# Altium PCB Standard 60.PcbDoc
Units mil, origin at the board's own origin, x right, y up, seen from the top; angles counter-clockwise.
Board outline 11157.21 x 3737.43 mil, 2 copper layers (Top Layer, Bottom Layer); 138 components, 95 nets, 535 pads, 0 vias.
Unrouted connection lines stored in the file: 182.
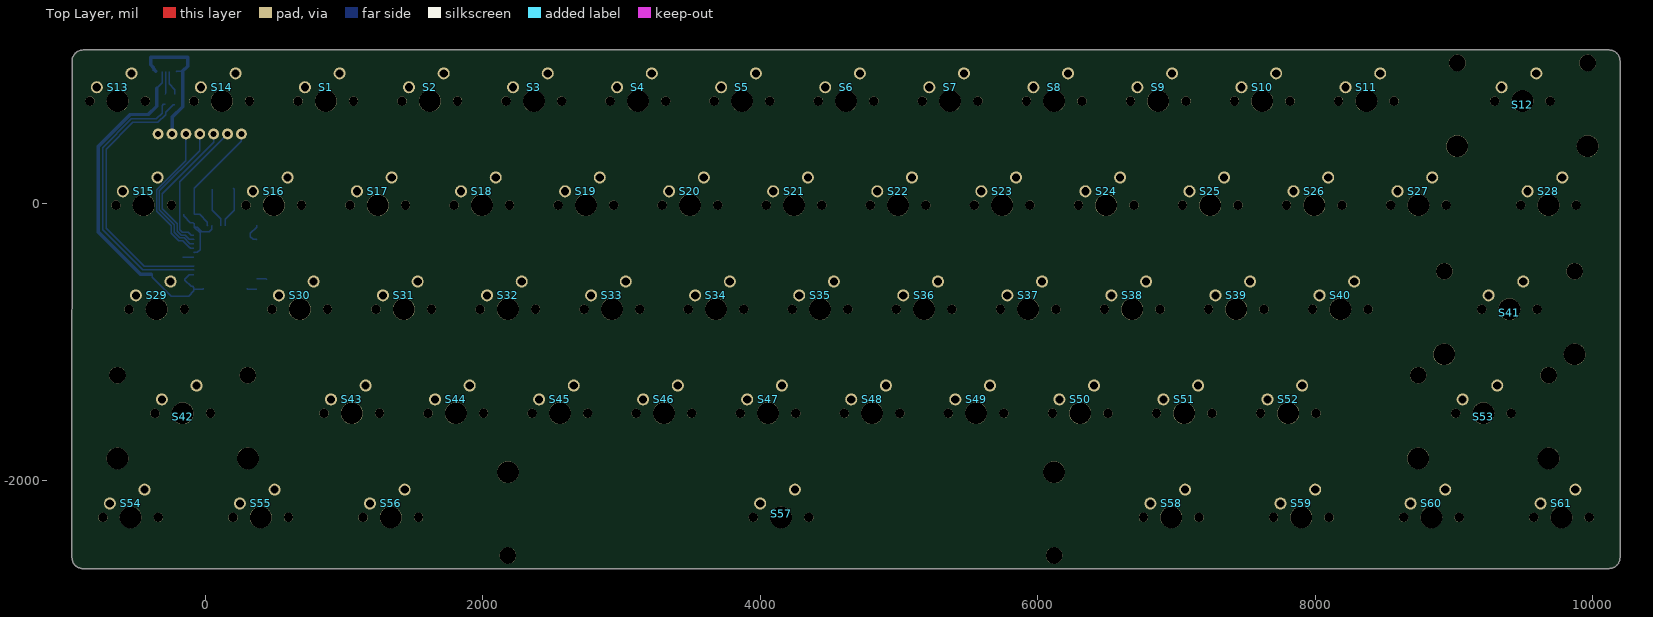
[diagram p0: Top Layer view]
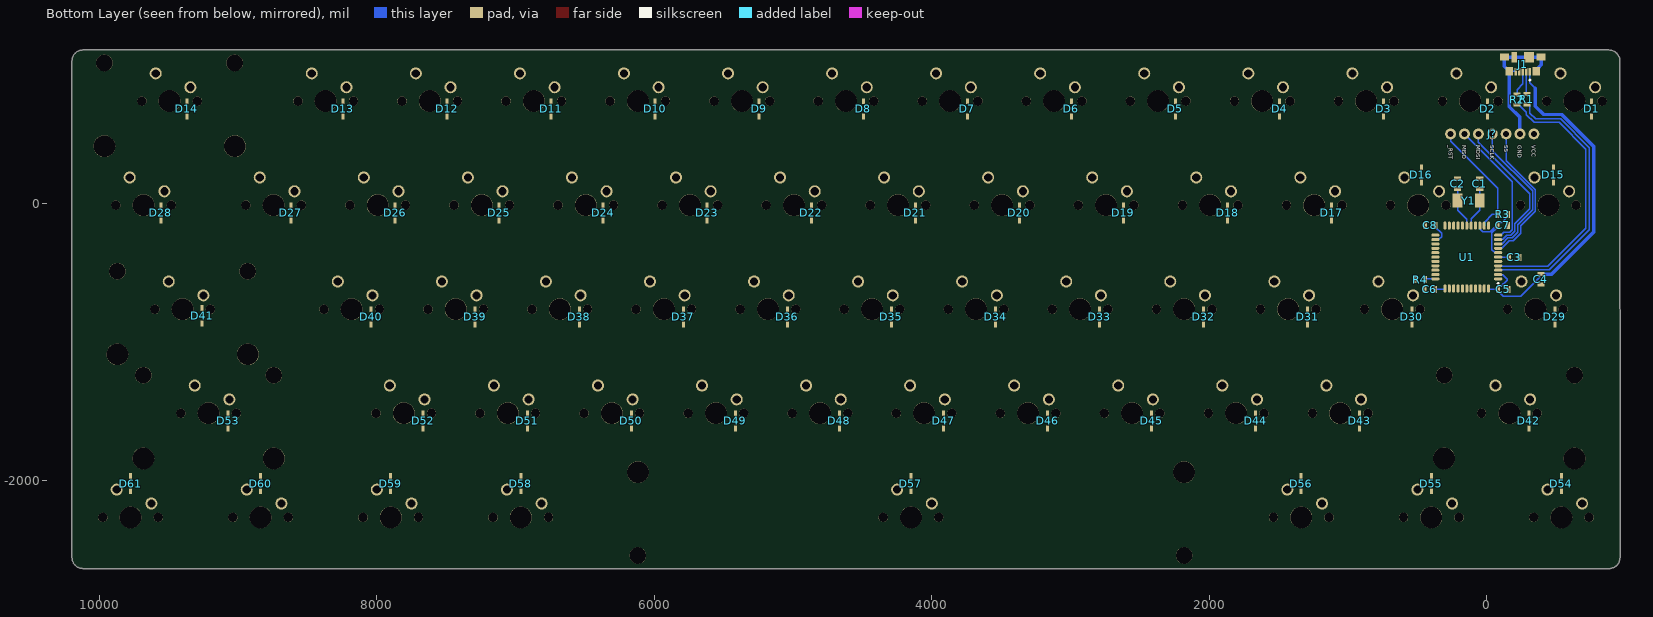
[diagram p1: Bottom Layer view, seen from below]

## Layer stack, top to bottom
Top Solder: solder mask 0.4, Solder Resist, Dk 3.5
Top Layer: signal copper 1.4
Dielectric 1: dielectric 12.6, FR-4, Dk 4.8
Bottom Layer: signal copper 1.4
Bottom Solder: solder mask 0.4, Solder Resist, Dk 3.5

## Board outline
-882.16,-2632.57 cw(c-882.16,-2553.83) -960.9,-2553.82 -960.15,1026.14 cw(c-881.41,1026.12) -881.41,1104.86 10117.57,1104.86 cw(c10117.57,1026.12) 10196.31,1026.12 10196.31,-2553.65 cw(c10117.57,-2553.65) 10117.57,-2632.39

## Design rules (kind name [scope] priority, off if disabled: settings)
Clearance [All] p1: gap=10 ignorepadtopadclearanceinfootprint=TRUE
ComponentClearance [All] p1: gap=10 collisioncheckmode=3 verticalgap=10 showdistances=FALSE donotcheckwithout3dbody=TRUE checkcomponentboundary=TRUE
DiffPairsRouting [All] p1: maxlimit=100 minlimit=10 mostfreqgap=15 toplayer_minwidth=10 toplayer_maxwidth=100 toplayer_prefwidth=15 bottomlayer_minwidth=10 bottomlayer_maxwidth=100 bottomlayer_prefwidth=15 maxuncoupledlength=500
PolygonConnect [All] p1: connectstyle=Relief reliefconductorwidth=10 reliefentries=4 polygonreliefangle="90 Angle" airgapwidth=10
RoutingVias [All] p1: holewidth=27.56 width=47.24 viastyle="Through Hole" minholewidth=19.68 minwidth=39.37 maxholewidth=39.37 maxwidth=59.06
SolderMaskExpansion [All] p1: expansion=4 istentingtop=FALSE
Width [All] p1: maxlimit=1000 minlimit=10 preferedwidth=25
28 further rules are at their usual default settings.

## Classes and differential pairs
net class ROW[5..1]: ROW1 ROW2 ROW3 ROW4 ROW5
net class COL[14..1]: COL1 COL2 COL3 COL4 COL5 COL6 COL7 COL8 COL9 COL10 COL11 COL12 COL13 COL14
component class MCU: C1 C2 C3 C4 C5 C6 C7 C8 J? R1 R2 R3 R4 U1 Y1
component class matrix: D1 D2 D3 D4 D5 D6 D7 D8 D9 D10 D11 D12 D13 D14 D15 D16 D17 D18 D19 D20 D21 D22 D23 D24 D25 D26 D27 D28 D29 D30 D31 D32 D33 D34 D35 D36 D37 D38 D39 D40 D41 D42 D43 D44 D45 D46 D47 D48 D49 D50 D51 D52 D53 D54 D55 D56 D57 D58 D59 D60 D61 S1 S2 S3 S4 S5 S6 S7 S8 S9 S10 S11 S12 S13 S14 S15 S16 S17 S18 S19 S20 S21 S22 S23 S24 S25 S26 S27 S28 S29 S30 S31 S32 S33 S34 S35 S36 S37 S38 S39 S40 S41 S42 S43 S44 S45 S46 S47 S48 S49 S50 S51 S52 S53 S54 S55 S56 S57 S58 S59 S60 S61
differential pair XT: +XT_P -XT_N
differential pair DP: +DP_P -DP_N
differential pair DP1: +DP1_P -DP1_N

## Components (designator, comment, footprint, x,y, rotation, side; value= is the part's Value field where it differs from the comment)
C1 "Cap" 0805 50,140 r270 bottom value=22pf
C2 "Cap" 0805 210,140 r270 bottom value=22pf
C3 "Cap" 0805 -200,-390 r0 bottom value=1uf
C4 "Cap" 0805 -390,-547.5 r90 bottom value=10uf
C5 "Cap" 0805 -120,-620 r0 bottom value=0.1uf
C6 "Cap" 0805 410,-620 r180 bottom value=0.1uf
C7 "Cap" 0805 -117.5,-160 r0 bottom value=0.1uf
C8 "Cap" 0805 407.5,-160 r180 bottom value=0.1uf
D1 "Diode" SOD-323F -756.94,681.18 r90 bottom
D2 "Diode" SOD-323F -6.94,681.18 r90 bottom
D3 "Diode" SOD-323F 743.06,681.18 r90 bottom
D4 "Diode" SOD-323F 1493.06,681.18 r90 bottom
D5 "Diode" SOD-323F 2243.06,681.18 r90 bottom
D6 "Diode" SOD-323F 2993.06,681.18 r90 bottom
D7 "Diode" SOD-323F 3743.06,681.18 r90 bottom
D8 "Diode" SOD-323F 4493.06,681.18 r90 bottom
D9 "Diode" SOD-323F 5243.06,681.18 r90 bottom
D10 "Diode" SOD-323F 5993.06,681.18 r90 bottom
D11 "Diode" SOD-323F 6743.06,681.18 r90 bottom
D12 "Diode" SOD-323F 7493.06,681.18 r90 bottom
D13 "Diode" SOD-323F 8243.06,681.18 r90 bottom
D14 "Diode" SOD-323F 9368.06,681.18 r90 bottom
D15 "Diode" SOD-323F -480,205.12 r270 bottom
D16 "Diode" SOD-323F 470,204.88 r270 bottom
D17 "Diode" SOD-323F 1118.03,-68.82 r90 bottom
D18 "Diode" SOD-323F 1868.03,-68.82 r90 bottom
D19 "Diode" SOD-323F 2618.03,-68.82 r90 bottom
D20 "Diode" SOD-323F 3368.03,-68.82 r90 bottom
D21 "Diode" SOD-323F 4118.03,-68.82 r90 bottom
D22 "Diode" SOD-323F 4868.03,-68.82 r90 bottom
D23 "Diode" SOD-323F 5618.03,-68.82 r90 bottom
D24 "Diode" SOD-323F 6368.03,-68.82 r90 bottom
D25 "Diode" SOD-323F 7118.03,-68.82 r90 bottom
D26 "Diode" SOD-323F 7868.03,-68.82 r90 bottom
D27 "Diode" SOD-323F 8618.03,-68.82 r90 bottom
D28 "Diode" SOD-323F 9555.52,-68.82 r90 bottom
D29 "Diode" SOD-323F -491.35,-818.82 r90 bottom
D30 "Diode" SOD-323F 539.9,-818.82 r90 bottom
D31 "Diode" SOD-323F 1289.9,-818.82 r90 bottom
D32 "Diode" SOD-323F 2039.9,-818.82 r90 bottom
D33 "Diode" SOD-323F 2789.9,-818.82 r90 bottom
D34 "Diode" SOD-323F 3539.9,-818.82 r90 bottom
D35 "Diode" SOD-323F 4289.9,-818.82 r90 bottom
D36 "Diode" SOD-323F 5039.9,-818.82 r90 bottom
D37 "Diode" SOD-323F 5789.9,-818.82 r90 bottom
D38 "Diode" SOD-323F 6539.9,-818.82 r90 bottom
D39 "Diode" SOD-323F 7289.9,-818.82 r90 bottom
D40 "Diode" SOD-323F 8039.9,-818.82 r90 bottom
D41 "Diode" SOD-323F 9258.65,-810.58 r90 bottom
D42 "Diode" SOD-323F -303.85,-1568.82 r90 bottom
D43 "Diode" SOD-323F 914.9,-1568.82 r90 bottom
D44 "Diode" SOD-323F 1664.9,-1568.82 r90 bottom
D45 "Diode" SOD-323F 2414.9,-1568.82 r90 bottom
D46 "Diode" SOD-323F 3164.9,-1568.82 r90 bottom
D47 "Diode" SOD-323F 3914.9,-1568.82 r90 bottom
D48 "Diode" SOD-323F 4664.9,-1568.82 r90 bottom
D49 "Diode" SOD-323F 5414.9,-1568.82 r90 bottom
D50 "Diode" SOD-323F 6164.9,-1568.82 r90 bottom
D51 "Diode" SOD-323F 6914.9,-1568.82 r90 bottom
D52 "Diode" SOD-323F 7664.9,-1568.82 r90 bottom
D53 "Diode" SOD-323F 9071.15,-1568.82 r90 bottom
D54 "Diode" SOD-323F -538.23,-2021.09 r270 bottom
D55 "Diode" SOD-323F 399.27,-2021.09 r270 bottom
D56 "Diode" SOD-323F 1336.77,-2021.09 r270 bottom
D57 "Diode" SOD-323F 4149.27,-2021.09 r270 bottom
D58 "Diode" SOD-323F 6961.77,-2021.09 r270 bottom
D59 "Diode" SOD-323F 7899.27,-2021.09 r270 bottom
D60 "Diode" SOD-323F 8836.77,-2021.09 r270 bottom
D61 "Diode" SOD-323F 9774.27,-2021.09 r270 bottom
J1 "Molex 473460001" "MOLEX 47346 0001" -260,1040 r0 bottom
J? "ISP HEADER" "SPI HEADER" -340,500 r270 bottom
R1 "Res" 0805 -290,750 r270 bottom value=22
R2 "Res" 0805 -220,747.5 r270 bottom value=22
R3 "Res" 0805 -117.5,-80 r0 bottom value=10k
R4 "Res" 0805 480,-550 r0 bottom value=10k
S1 "1u" MX1U 868.06,736.3 r0 top
S2 "1u" MX1U 1618.03,736.3 r0 top
S3 "1u" MX1U 2368.06,736.3 r0 top
S4 "1u" MX1U 3118.06,736.3 r0 top
S5 "1u" MX1U 3868.06,736.3 r0 top
S6 "1u" MX1U 4618.06,736.3 r0 top
S7 "1u" MX1U 5368.02,736.3 r0 top
S8 "1u" MX1U 6118.06,736.3 r0 top
S9 "1u" MX1U 6868.02,736.3 r0 top
S10 "1u" MX1U 7618.06,736.3 r0 top
S11 "1u" MX1U 8368.06,736.3 r0 top
S12 "2u" MX2U 9493.02,736.3 r0 top
S13 "1u" MX1U -631.94,736.3 r0 top
S14 "1u" MX1U 118.06,736.3 r0 top
S15 "1u" MX1U -444.42,-13.7 r0 top
S16 "1u" MX1U 493.03,-13.7 r0 top
S17 "1u" MX1U 1243.06,-13.7 r0 top
S18 "1u" MX1U 1993.06,-13.7 r0 top
S19 "1u" MX1U 2743.06,-13.7 r0 top
S20 "1u" MX1U 3493.02,-13.7 r0 top
S21 "1u" MX1U 4243.03,-13.7 r0 top
S22 "1u" MX1U 4993.02,-13.7 r0 top
S23 "1u" MX1U 5743.06,-13.7 r0 top
S24 "1u" MX1U 6493.06,-13.7 r0 top
S25 "1u" MX1U 7243.02,-13.7 r0 top
S26 "1u" MX1U 7993.06,-13.7 r0 top
S27 "1u" MX1U 8743.02,-13.7 r0 top
S28 "1u" MX1U 9680.52,-13.7 r0 top
S29 "1u" MX1U -350.67,-763.73 r0 top
S30 "1u" MX1U 680.59,-763.73 r0 top
S31 "1u" MX1U 1430.5,-763.73 r0 top
S32 "1u" MX1U 2180.53,-763.73 r0 top
S33 "1u" MX1U 2930.53,-763.73 r0 top
S34 "1u" MX1U 3680.52,-763.73 r0 top
S35 "1u" MX1U 4430.52,-763.73 r0 top
S36 "1u" MX1U 5180.52,-763.73 r0 top
S37 "1u" MX1U 5930.58,-763.73 r0 top
S38 "1u" MX1U 6680.52,-763.73 r0 top
S39 "1u" MX1U 7430.58,-763.73 r0 top
S40 "1u" MX1U 8180.58,-763.73 r0 top
S41 "2u" MX2U 9399.25,-763.73 r0 top
S42 "2u" MX2U -163.22,-1513.71 r0 top
S43 "1u" MX1U 1055.59,-1513.71 r0 top
S44 "1u" MX1U 1805.59,-1513.71 r0 top
S45 "1u" MX1U 2555.59,-1513.71 r0 top
S46 "1u" MX1U 3305.52,-1513.71 r0 top
S47 "1u" MX1U 4055.58,-1513.71 r0 top
S48 "1u" MX1U 4805.52,-1513.71 r0 top
S49 "1u" MX1U 5555.58,-1513.71 r0 top
S50 "1u" MX1U 6305.58,-1513.71 r0 top
S51 "1u" MX1U 7055.52,-1513.71 r0 top
S52 "1u" MX1U 7805.58,-1513.71 r0 top
S53 "2u" MX2U 9211.78,-1513.71 r0 top
S54 "1u" MX1U -538.19,-2263.7 r0 top
S55 "1u" MX1U 399.28,-2263.7 r0 top
S56 "1u" MX1U 1336.81,-2263.7 r0 top
S57 "6.25u" "MX6.25U FLIPPED STAB" 4149.32,-2263.7 r0 top
S58 "1u" MX1U 6961.78,-2263.7 r0 top
S59 "1u" MX1U 7899.32,-2263.7 r0 top
S60 "1u" MX1U 8836.78,-2263.7 r0 top
S61 "1u" MX1U 9774.28,-2263.7 r0 top
U1 "ATmega32U4" TQFP44 143.62,-387.48 r0 bottom
Y1 "XTAL" ABM3 130,20 r0 bottom value=16MHz

## Footprints (in the part's own frame and the unit in brackets; to place one, negate y for a bottom-side part, rotate by r counter-clockwise, add the part's x,y. Pads: shape width x height; smd on the part's side, far side on the other; paste and mask are expansions set on the pad)
0805 [mil]
  rect 28x51 smd: 1(-37.5,0) 2(37.5,0)
ABM3 [mil] "ABRACON SMD XTAL PACKAGE"
  rect 70x100 smd: 1(-80,0) 2(80,0)
"MOLEX 47346 0001" [mm]
  rect 0.45x1.38 smd paste+0 mask+0: 1(-1.3,2.31) 2(-0.65,2.31) 3(0,2.31) 4(0.65,2.31) 5(1.3,2.31)
  rect 1.425x1.55 smd paste+0 mask+0: 6(-2.488,2.225) 7(2.488,2.225)
  rect 1.65x1.3 smd paste+0 mask+0: 8(-3.375,-0.35) 11(3.375,-0.35)
  rect 1.8x1.9 smd paste+0 mask+0: 9(-1.15,-0.35)
  rect 1x1.9 smd paste+0 mask+0: 10(1.55,-0.35)
  silkscreen extent -1.45,3.73 -1.2,3.97
MX1U [mm]
  round 2.2 hole 1.5: 1(2.54,5.08) 2(-3.81,2.54)
  round 1.7 hole 1.7 unplated: ""(-5.08,0) ""(5.08,0)
  round 4 hole 4 unplated: ""(0,0)
MX2U [mil]
  round 86.61 hole 59.06: 1(100,200) 2(-150,100)
  round 157 hole 157 unplated: ""(-470,-325) ""(470,-325)
  round 120 hole 120 unplated: ""(-470,275) ""(470,275)
  round 66.93 hole 66.93 unplated: ""(-200,0) ""(200,0)
  round 157.48 hole 157.48 unplated: ""(0,0)
"MX6.25U FLIPPED STAB" [mm]
  round 2.2 hole 1.5: 1(2.54,5.08) 2(-3.81,2.54)
  round 3.048 hole 3.048 unplated: ""(-50,-6.985) ""(50,-6.985)
  round 3.988 hole 3.988 unplated: ""(-50,8.255) ""(50,8.255)
  round 1.7 hole 1.7 unplated: ""(-5.08,0) ""(5.08,0)
  round 4 hole 4 unplated: ""(0,0)
SOD-323F [mm]
  rect 1.05x0.55 smd: 1(-1.4,0) 2(1.4,0)
"SPI HEADER" [mm]
  round 2 hole 1.1: 1(0,0) 2(0,-2.54) 3(0,-5.08) 4(0,-7.62) 5(0,-10.16) 6(0,-12.7) 7(0,-15.24)
TQFP44 [mm] "TQFP, 44-Leads, Body 10.00x10.00mm"
  oval 1.5x0.55 smd: 1(-5.75,4) 2(-5.75,3.2) 3(-5.75,2.4) 4(-5.75,1.6) 5(-5.75,0.8) 6(-5.75,0) 7(-5.75,-0.8) 8(-5.75,-1.6) 9(-5.75,-2.4) 10(-5.75,-3.2) 11(-5.75,-4) 23(5.75,-4) 24(5.75,-3.2) 25(5.75,-2.4) 26(5.75,-1.6) 27(5.75,-0.8) 28(5.75,0) 29(5.75,0.8) 30(5.75,1.6) 31(5.75,2.4) 32(5.75,3.2) 33(5.75,4)
  oval 0.55x1.5 smd: 12(-4,-5.75) 13(-3.2,-5.75) 14(-2.4,-5.75) 15(-1.6,-5.75) 16(-0.8,-5.75) 17(0,-5.75) 18(0.8,-5.75) 19(1.6,-5.75) 20(2.4,-5.75) 21(3.2,-5.75) 22(4,-5.75) 34(4,5.75) 35(3.2,5.75) 36(2.4,5.75) 37(1.6,5.75) 38(0.8,5.75) 39(0,5.75) 40(-0.8,5.75) 41(-1.6,5.75) 42(-2.4,5.75) 43(-3.2,5.75) 44(-4,5.75)
  silkscreen extent -5.87,4.7 -5.63,4.95

## Part data
C1 C2 C3 C4 C5 C6 C7 C8: "Capacitor"
J1: "Micro usb receptacle"
R1 R2 R3 R4: "Resistor"
  R1: LatestRevisionDate=17-Jul-2002, LatestRevisionNote="Re-released for DXP Platform.", PackageDescription="Axial Device, Thru-Hole; 2 Leads; 0.4 in Pin Spacing", PackageReference=AXIAL-0.4, Published=8-Jun-2000, Publisher="Altium Limited"
S1 S2 S3 S4 S5 S6 S7 S8 S9 S10 S11 S13 S14 S15 S16 S17 S18 S19 S20 S21 S22 S23 S24 S25 S26 S27 S28 S29 S30 S31 S32 S33 S34 S35 S36 S37 S38 S39 S40 S43 S44 S45 S46 S47 S48 S49 S50 S51 S52 S54 S55 S56 S58 S59 S60 S61: "1-2u Mx Switch"
S12 S41 S42 S53: "2-3u Mx Switch with pcb mount stabs"
S57: "6.25u Mx Switch with pcb mount stabs"
U1: "8-bit AVR Microcontroller", Manufacturer="Microchip / Atmel", Manufacturer Part Number=ATMEGA32U4-AU, ComponentLink1Description="Manufacturer URL", ComponentLink1URL=http://www.atmel.com/, ComponentLink2Description="ATmega16U4/32U4 Datasheet", ComponentLink2URL=http://www.atmel.com/dyn/resources/prod_documents/doc7766.pdf, ComponentLink3Description="ATmega16U4 ATmega32U4 Summary", ComponentLink3URL=http://www.atmel.com/dyn/resources/prod_documents/7766S.pdf, DatasheetVersion="revF, Nov-2010", PackageDescription="44-Pin Plastic Thin Quad Flat Pack, 10 x 10 x 1.0 mm Body, 0.8 mm Pitch (TQFP)", PackageReference=44ML, PackageVersion="rev.G, Jul-2007", RevisionNote="DatasheetVersion updated. URLs added."
Y1: "Crystal Oscillator"

## Nets (pads, with @x,y where several pads share a name; then routed paths per layer and width w, separated by ;. In a path a pad name is that pad's centre, name@x,y a point inside that pad or via, vN(x,y) a via of type N, cw(c..) or ccw(c..) an arc to the next point about the centre after c; other vN are vias at no path point)
\R\E\S\E\T\: J?.7 R3.2 U1.13 | length 866
  Bottom Layer w10: U1.13 15.41,-158.87 15.41,-135.14 -39.74,-80 R3.2 -80,108.21 257.42,445.63 257.42,497.42 J?.7
COL1: S13.1 S15.1 S29.1 S42.1 S54.1
COL2: S14.1 S16.1 S30.1 S55.1
COL3: S1.1 S17.1 S31.1 S43.1 S56.1
COL4: S2.1 S18.1 S32.1 S44.1
COL5: S3.1 S19.1 S33.1 S45.1
COL6: S4.1 S20.1 S34.1 S46.1
COL7: S5.1 S21.1 S35.1 S47.1 S57.1
COL8: S6.1 S22.1 S36.1 S48.1
COL9: S7.1 S23.1 S37.1 S49.1
COL10: S8.1 S24.1 S38.1 S50.1
COL11: S9.1 S25.1 S39.1 S51.1 S58.1
COL12: S10.1 S26.1 S40.1 S52.1 S59.1
COL13: S11.1 S27.1 S60.1
COL14: S12.1 S28.1 S41.1 S53.1 S61.1
DP1_N: R1.2 U1.3 | length 1979.9
  Bottom Layer w10: R1.2 -301.5,712.5 -310.5,703.5 -310.5,649.5 -352.44,607.56 -533.55,607.56 -740,401.11 -740,-190 -451.28,-478.72 -112.94,-478.72 -111.93,-479.74 -84.99,-479.74 U1.3
DP1_P: R2.2 U1.4 | length 1954.6
  Bottom Layer w10: R2.2 -231.5,710 -285.5,656 -285.5,639.14 -342.09,582.56 -523.2,582.56 -715,390.75 -715,-179.64 -440.92,-453.72 -112.94,-453.72 -111.93,-452.7 -84.99,-452.7 U1.4
DP_N: J1.2 R1.1 | length 163.6
  Bottom Layer w10: R1.1 -285.3,792.2 -285.3,948.76 J1.2
DP_P: J1.3 R2.1 | length 180.9
  Bottom Layer w10: J1.3 -260.3,948.76 -260.3,860.3 -220,820 R2.1
GND: C1.1 C2.1 C3.1 C4.1 C5.1 C6.1 C7.1 C8.1 J1.5 J1.6 J1.7 J1.8 J1.9 J1.10 J1.11 J?.2 R4.2 U1.5 U1.15 U1.23 U1.35 U1.43 | length 1031.7
  Bottom Layer w10: J1.5 -205.47,952.4 J1.7
  Bottom Layer w25: J1.6 -373.48,967.95 -373.48,978.29 -392.87,997.68 J1.8 J1.9 J1.10 J1.11 -127.13,987.34 -144.06,970.41 -146.52,970.41 -162.07,954.86 J1.7 -162.07,696.61 -240,618.68 J?.2
HWB: R4.1 U1.33 | length 74.6
  Bottom Layer w10: U1.33 437.46,-544.96 R4.1
MISO: J?.6 U1.11 | length 951.3
  Bottom Layer w10: U1.11 -101.46,-230 -122.04,-209.41 -166.3,-209.41 -184,-191.71 -184,156 J?.6
MOSI: J?.5 U1.10 | length 1044.4
  Bottom Layer w10: U1.10 -84.99,-259.27 -115.14,-259.27 -144.99,-229.41 -174.59,-229.41 -204,-200 -204,-146.68 -310.68,-40 -310.68,70.15 60,440.83 J?.5
NetD1_2: D1.2 S13.2
NetD2_2: D2.2 S14.2
NetD3_2: D3.2 S1.2
NetD4_2: D4.2 S2.2
NetD5_2: D5.2 S3.2
NetD6_2: D6.2 S4.2
NetD7_2: D7.2 S5.2
NetD8_2: D8.2 S6.2
NetD9_2: D9.2 S7.2
NetD10_2: D10.2 S8.2
NetD11_2: D11.2 S9.2
NetD12_2: D12.2 S10.2
NetD13_2: D13.2 S11.2
NetD14_2: D14.2 S12.2
NetD15_2: D15.2 S15.2
NetD16_2: D16.2 S16.2
NetD17_2: D17.2 S17.2
NetD18_2: D18.2 S18.2
NetD19_2: D19.2 S19.2
NetD20_2: D20.2 S20.2
NetD21_2: D21.2 S21.2
NetD22_2: D22.2 S22.2
NetD23_2: D23.2 S23.2
NetD24_2: D24.2 S24.2
NetD25_2: D25.2 S25.2
NetD26_2: D26.2 S26.2
NetD27_2: D27.2 S27.2
NetD28_2: D28.2 S28.2
NetD29_2: D29.2 S29.2
NetD30_2: D30.2 S30.2
NetD31_2: D31.2 S31.2
NetD32_2: D32.2 S32.2
NetD33_2: D33.2 S33.2
NetD34_2: D34.2 S34.2
NetD35_2: D35.2 S35.2
NetD36_2: D36.2 S36.2
NetD37_2: D37.2 S37.2
NetD38_2: D38.2 S38.2
NetD39_2: D39.2 S39.2
NetD40_2: D40.2 S40.2
NetD41_2: D41.2 S41.2
NetD42_2: D42.2 S42.2
NetD43_2: D43.2 S43.2
NetD44_2: D44.2 S44.2
NetD45_2: D45.2 S45.2
NetD46_2: D46.2 S46.2
NetD47_2: D47.2 S47.2
NetD48_2: D48.2 S48.2
NetD49_2: D49.2 S49.2
NetD50_2: D50.2 S50.2
NetD51_2: D51.2 S51.2
NetD52_2: D52.2 S52.2
NetD53_2: D53.2 S53.2
NetD54_2: D54.2 S54.2
NetD55_2: D55.2 S55.2
NetD56_2: D56.2 S56.2
NetD57_2: D57.2 S57.2
NetD58_2: D58.2 S58.2
NetD59_2: D59.2 S59.2
NetD60_2: D60.2 S60.2
NetD61_2: D61.2 S61.2
ROW1: D1.1 D2.1 D3.1 D4.1 D5.1 D6.1 D7.1 D8.1 D9.1 D10.1 D11.1 D12.1 D13.1 D14.1
ROW2: D15.1 D16.1 D17.1 D18.1 D19.1 D20.1 D21.1 D22.1 D23.1 D24.1 D25.1 D26.1 D27.1 D28.1
ROW3: D29.1 D30.1 D31.1 D32.1 D33.1 D34.1 D35.1 D36.1 D37.1 D38.1 D39.1 D40.1 D41.1
ROW4: D42.1 D43.1 D44.1 D45.1 D46.1 D47.1 D48.1 D49.1 D50.1 D51.1 D52.1 D53.1
ROW5: D54.1 D55.1 D56.1 D57.1 D58.1 D59.1 D60.1 D61.1
SCLK: J?.4 U1.9 | length 1049.2
  Bottom Layer w10: U1.9 -84.99,-290.76 -111.93,-290.76 -153.28,-249.41 -182.87,-249.41 -224,-208.28 -224,-154.96 -330.68,-48.28 -330.68,89.29 -40,379.97 J?.4
SS: J?.3 U1.8 | length 1054
  Bottom Layer w10: J?.3 -140,308.26 -350.68,97.58 -350.68,-56.57 -244,-163.24 -244,-216.57 -191.15,-269.41 -161.56,-269.41 -112.15,-318.82 -110.28,-318.82 -104.61,-324.49 U1.8
UCAP: C3.2 U1.6 | length 80.8
  Bottom Layer w10: C3.2 -159.98,-387.48 U1.6
VCC: C4.2 C5.2 C6.2 C7.2 C8.2 J1.1 J?.1 R3.1 U1.2 U1.7 U1.14 U1.24 U1.34 U1.44 | length 3368
  Bottom Layer w10: C4.2 -381.14,-518.86 -381.14,-533.14 -244.29,-670 -121,-670 -82.5,-631.5 C5.2 ; -350,830.74 -311.18,869.56 J1.1 ; R3.1 -155,-91.5 -107,-139.5 -89,-139.5 -80,-148.5 C7.2 C7.2@-80,-164.14 ; U1.2 -84.99,-515.69 -115.69,-515.69 -147.11,-547.11 -147.11,-555.39 -102.86,-599.64 -91.5,-599.64 -82.5,-608.64 C5.2 ; U1.7 -80.53,-353.75 -56.8,-353.75 -38.23,-335.19 -38.23,-213.27 -80,-171.5 C7.2@-80,-164.14 ; U1.44 -13.86,-614.62 -19.24,-620 C5.2 ; U1.14 46.9,-163.33 46.9,-187.06 28.34,-205.63 -24.56,-205.63 -40.61,-189.57 -40.61,-189.39 -56.86,-173.14 -71,-173.14 C7.2@-80,-164.14 ; U1.34 301.1,-614.62 306.49,-620 C6.2 ; U1.24 367.77,-259.27 344.04,-259.27 325.47,-240.7 325.47,-216.03 370,-171.5 C8.2
  Bottom Layer w25: C4.2 -470,-510 -770,-210 -770,410 -540,640 -410,640 -350,700 -350,830.74
XT_N: C2.2 U1.17 Y1.2 | length 302.7
  Bottom Layer w10: U1.17 143.87,-160.85 143.87,-116.13 210,-50 Y1.2 210,100 C2.2@200,110
XT_P: C1.2 U1.16 Y1.1 | length 289.3
  Bottom Layer w10: C1.2 Y1.1 50,-50 112.07,-112.07 U1.16@112.07,-161.05
pads on no net: J1.4 S1. S2. S3. S4. S5. S6. S7. S8. S9. S10. S11. S12. S13. S14. S15. S16. S17. S18. S19. S20. S21. S22. S23. S24. S25. S26. S27. S28. S29. S30. S31. S32. S33. S34. S35. S36. S37. S38. S39. S40. S41. S42. S43. S44. S45. S46. S47. S48. S49. S50. S51. S52. S53. S54. S55. S56. S57. S58. S59. S60. S61. U1.1 U1.12 U1.18 U1.19 U1.20 U1.21 U1.22 U1.25 U1.26 U1.27 U1.28 U1.29 U1.30 U1.31 U1.32 U1.36 U1.37 U1.38 U1.39 U1.40 U1.41 U1.42

## Silkscreen, mask and mechanical layers (free items; w line width, h text height)
Mechanical 2:
  drawing of 323 lines, arcs and shapes, not listed
Mechanical 3:
  the board outline again, w0.5

## Text inside footprints (layer, text, board x,y; h text height)
J?: Bottom Overlay "MOSI" at 74.99,420 h30 r90; Bottom Overlay "MISO" at 174.99,420 h30 r90; Bottom Overlay "SCLK" at -25.01,420 h30 r90; Bottom Overlay "SS" at -125.01,420 h30 r90; Bottom Overlay "GND" at -225.01,420 h30 r90; Bottom Overlay "VCC" at -325,420 h30 r90; Bottom Overlay "_RST" at 272.49,420 h30 r90
U1: Mechanical 1 "GND" at 297.96,-224.1 h11.81 r180; Mechanical 1 "AVCC" at 286.15,-255.59 h11.81 r180; Mechanical 1 "RESET_" at 22.56,-201.65 h11.81 r90; Mechanical 1 "VCC" at 55.04,-201.65 h11.81 r90; Mechanical 1 "GND" at 86.54,-201.65 h11.81 r90; Mechanical 1 "XTAL2" at 118.03,-201.65 h11.81 r90; Mechanical 1 "XTAL1" at 149.53,-201.65 h11.81 r90; Mechanical 1 "AREF" at 55.04,-530.01 h11.81 r90; Mechanical 1 "GND" at 275.51,-541.82 h11.81 r90; Mechanical 1 "VCC" at 307,-541.82 h11.81 r90; Mechanical 1 "GND" at 23.54,-541.82 h11.81 r90; Mechanical 1 "AVCC" at -7.95,-530.01 h11.81 r90; Mechanical 1 "UVCC" at -42.2,-507.56 h11.81 r180; Mechanical 1 "D-" at -42.2,-476.07 h11.81 r180; Mechanical 1 "D+" at -42.2,-444.57 h11.81 r180; Mechanical 1 "UGND" at -42.2,-413.07 h11.81 r180; Mechanical 1 "UCAP" at -42.2,-381.58 h11.81 r180; Mechanical 1 "VBUS" at -42.2,-350.08 h11.81 r180; Mechanical 1 "SS" at -42.2,-318.58 h11.81 r180; Mechanical 1 "SCLK" at -42.2,-287.09 h11.81 r180; Mechanical 1 "MOSI" at -42.2,-255.59 h11.81 r180; Mechanical 1 "MISO" at -42.2,-224.1 h11.81 r180